# Altium PCB esc_backup.PcbDoc (part 1 of 2)
Units mil, origin at the board's own origin, x right, y up, seen from the top; angles counter-clockwise.
Board outline 1181.1 x 1181.1 mil, 2 copper layers (Top Layer, Bottom Layer); 362 components, 209 nets, 906 pads, 130 vias.
Unrouted connection lines stored in the file: 531.
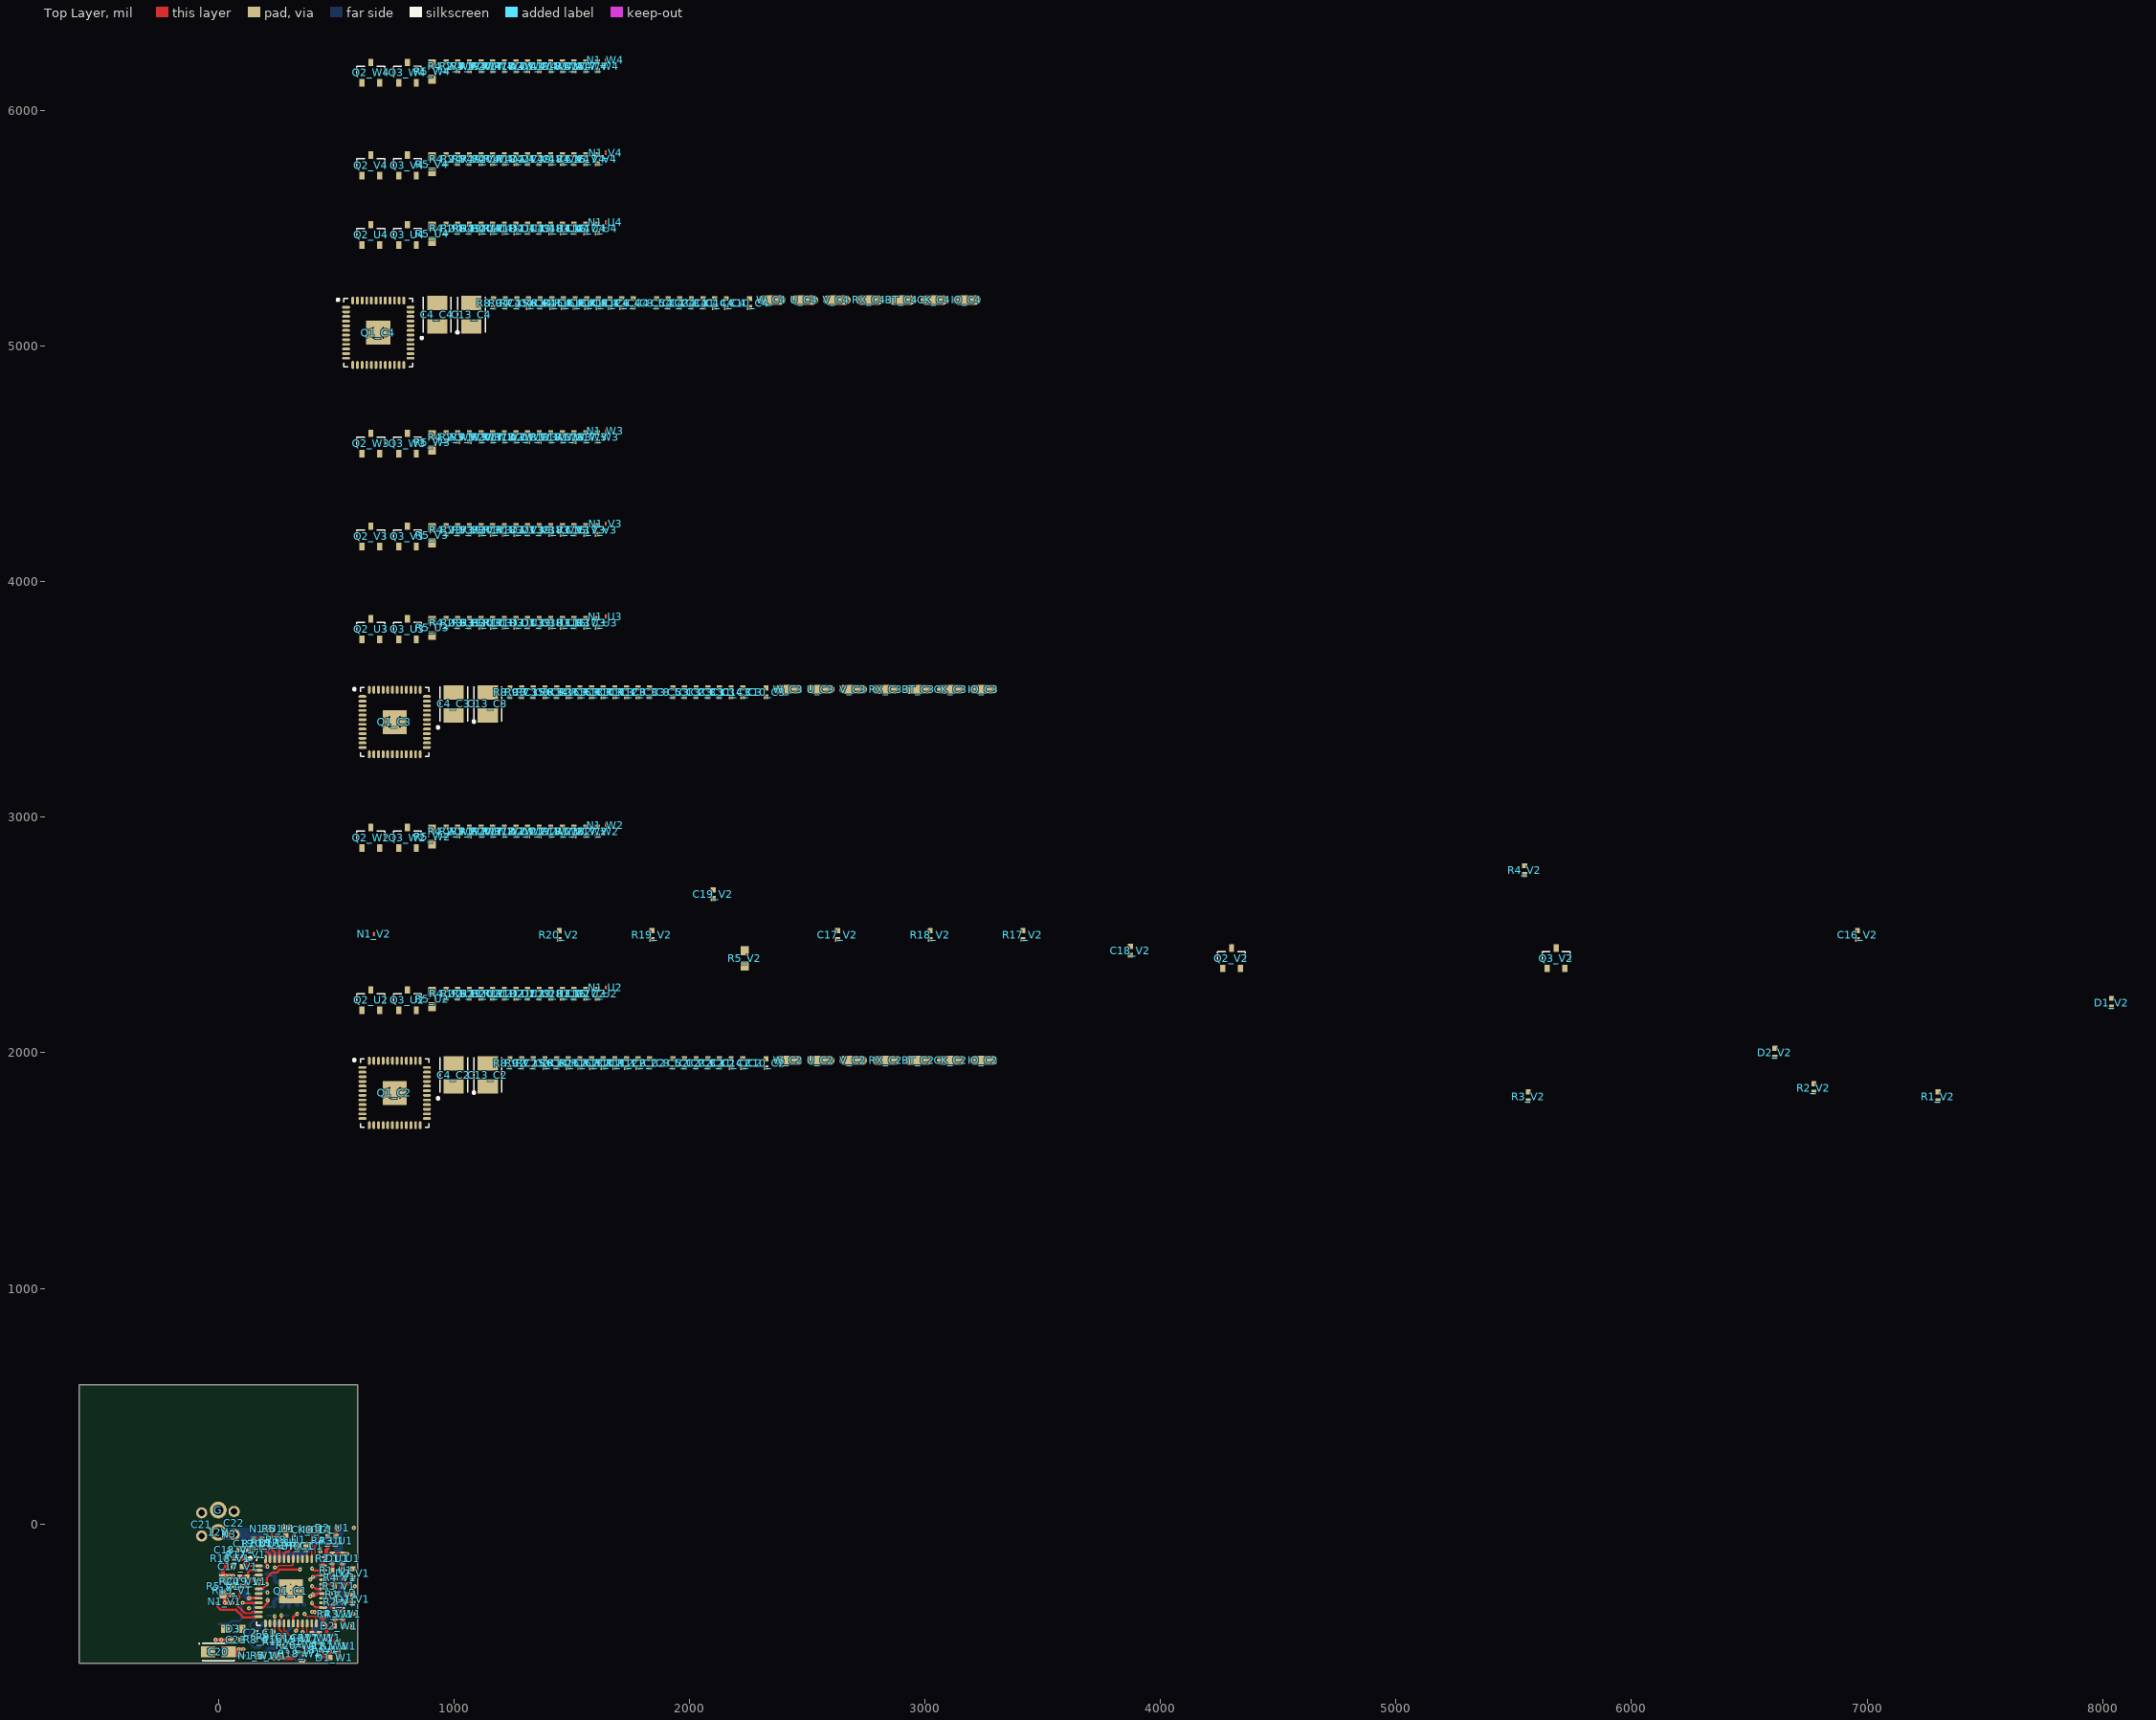
[diagram p0: Top Layer view]
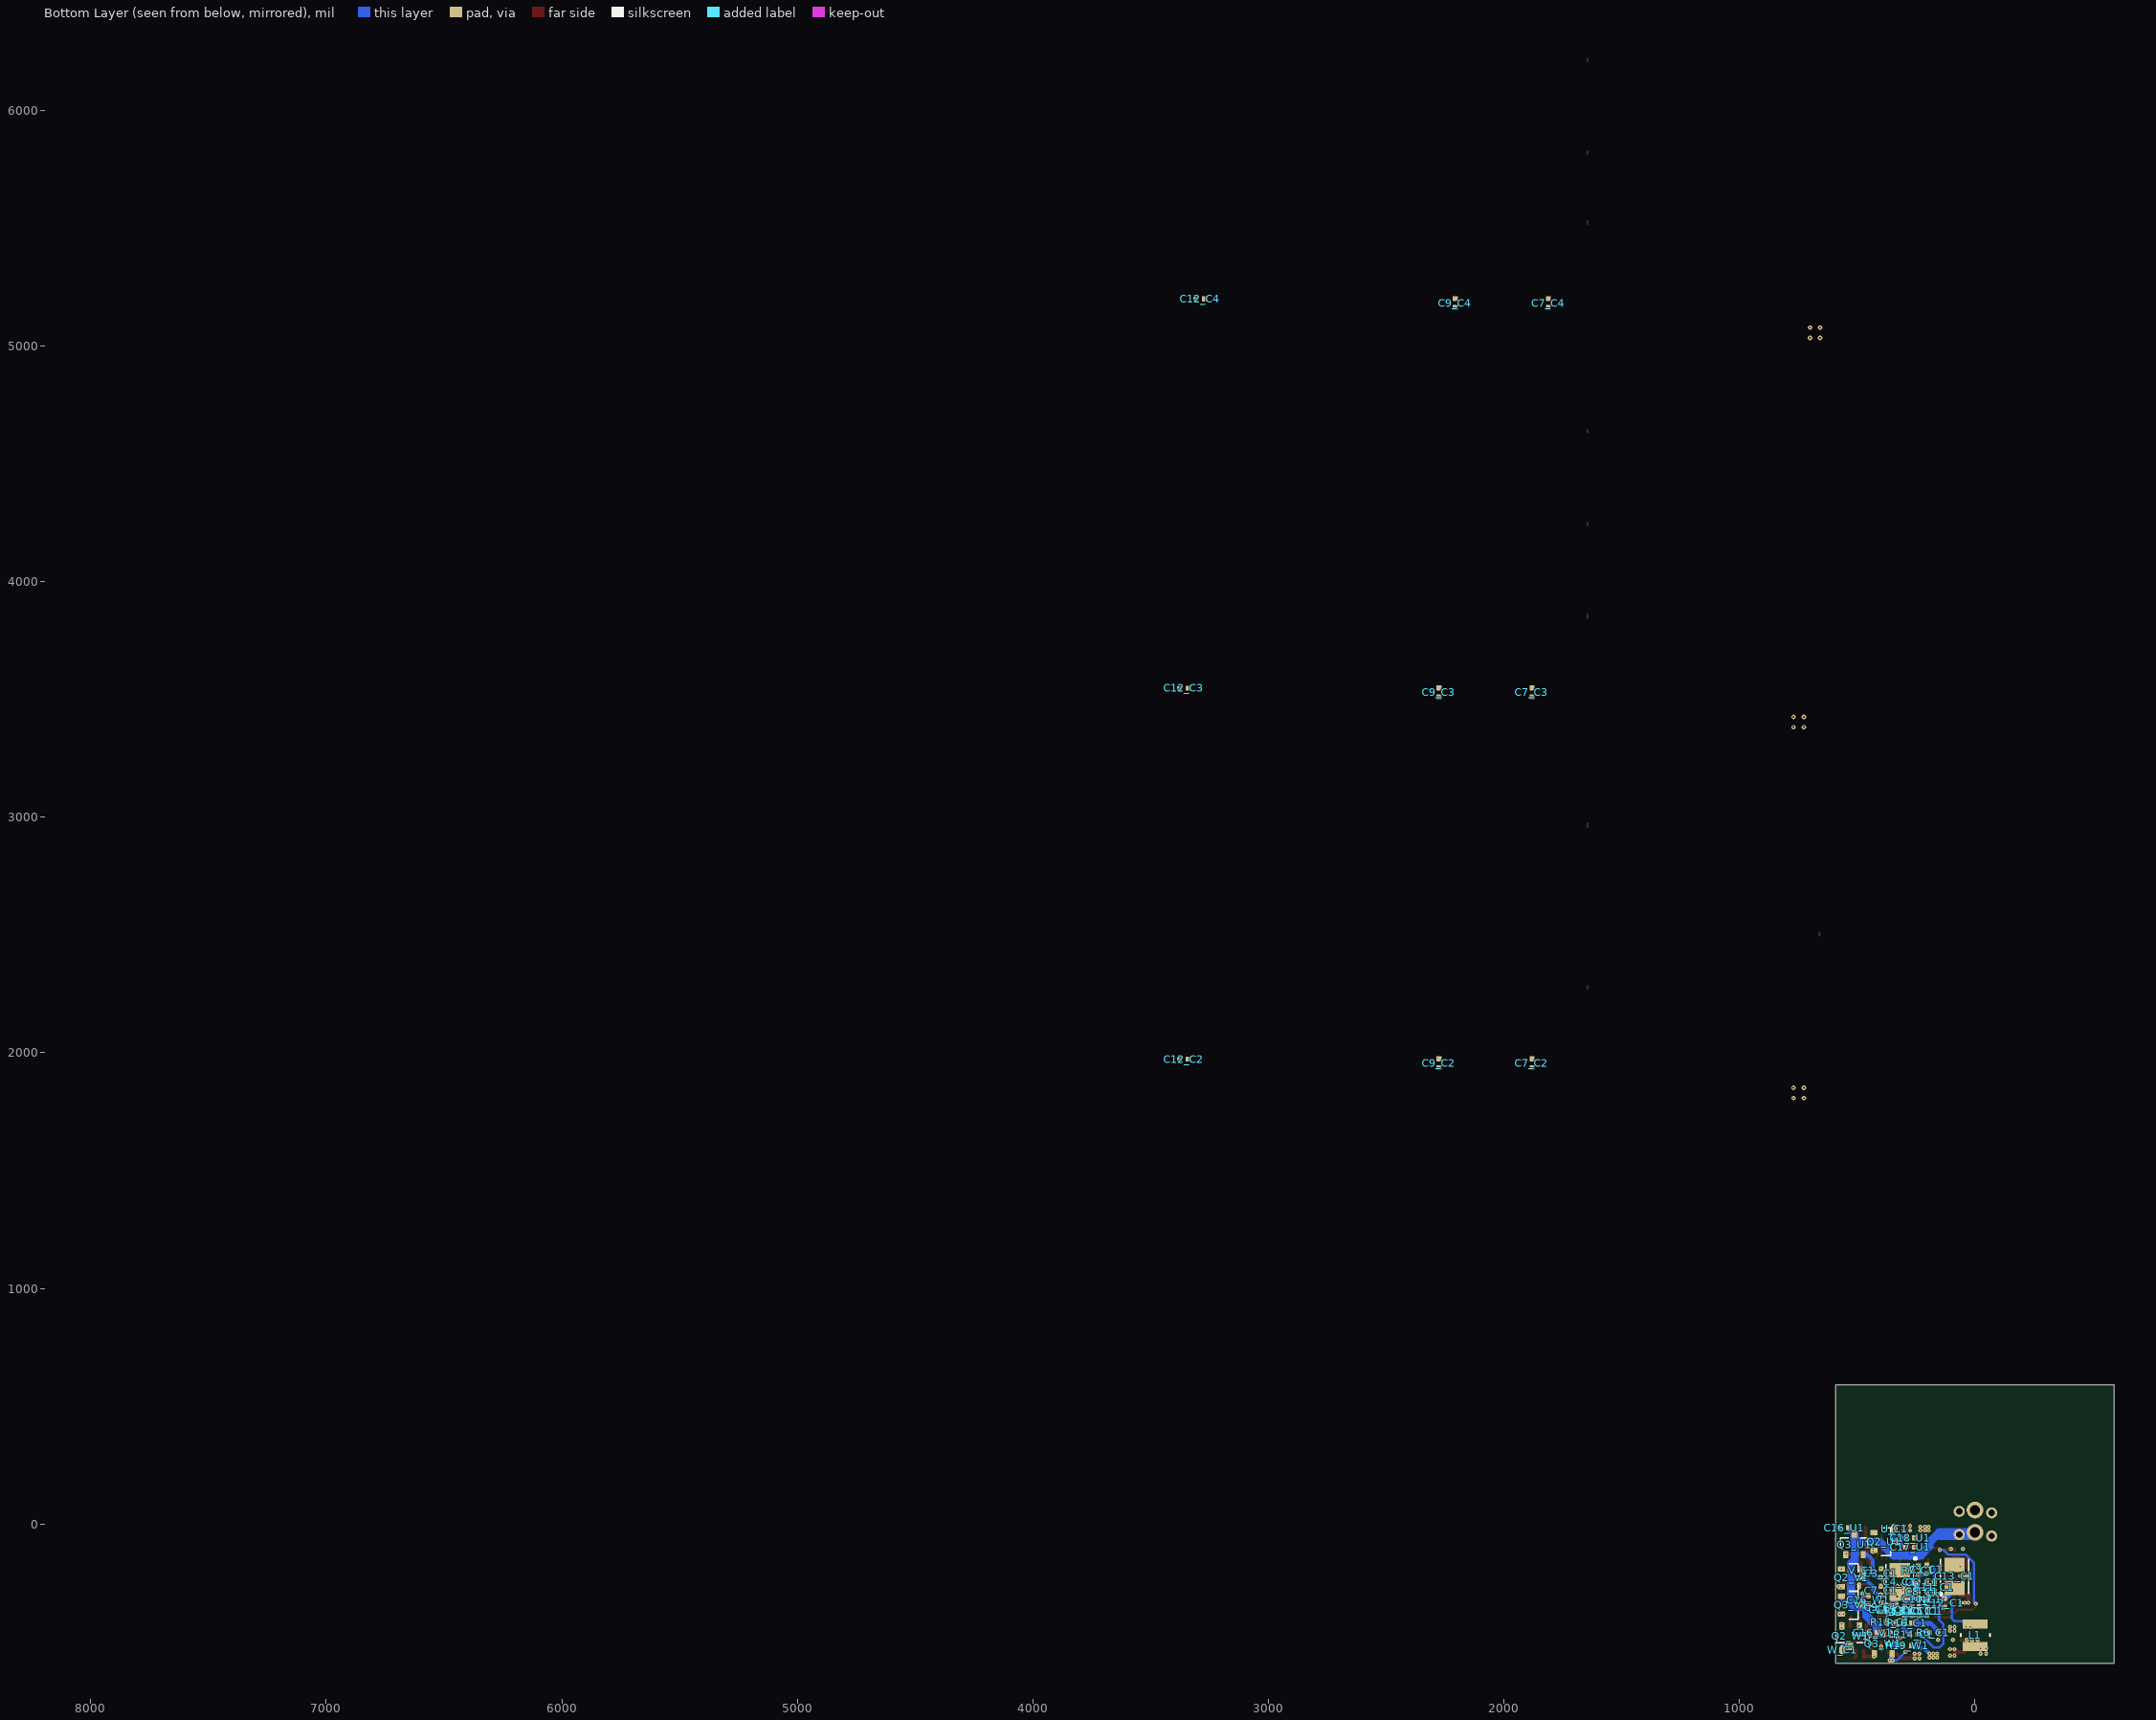
[diagram p1: Bottom Layer view, seen from below]

## Layer stack, top to bottom
Top Solder: solder mask 0.4, Solder Resist, Dk 3.5
Top Layer: signal copper 1.4
Dielectric 1: dielectric 12.6, FR-4, Dk 4.8
Bottom Layer: signal copper 1.4
Bottom Solder: solder mask 0.4, Solder Resist, Dk 3.5

## Board outline
-590.55,-590.55 -590.55,590.55 590.55,590.55 590.55,-590.55

## Design rules (kind name [scope] priority, off if disabled: settings)
Clearance [All] p1: gap=7 ignorepadtopadclearanceinfootprint=FALSE except(0: Arc-Hole Track-Hole SMDPad-Hole THPad-Hole Via-Hole Fill-Hole Poly-Hole Region-Hole Text-Hole; 10: THPad-THPad THPad-Via THPad-Fill THPad-Poly THPad-Region THPad-Text Via-Via Via-Fill Via-Poly Via-Region Via-Text Fill-Fill Fill-Poly Fill-Region Fill-Text Poly-Poly Poly-Region Poly-Text Region-Region Region-Text Text-Text)
ComponentClearance [All] p1: gap=6 collisioncheckmode=3 verticalgap=10 showdistances=FALSE
MinimumSolderMaskSliver [All] p1: minsoldermaskwidth=8
PolygonConnect [All] p1: connectstyle=Relief reliefconductorwidth=10 reliefentries=4 polygonreliefangle="90 Angle" airgapwidth=10
RoomDefinition W4 [InComponentClass('W4')] p1: confinementstyle=ConfineIn formatcopy=TRUE lockcomponents=FALSE outline 561.73,5846.42 7353.07,5846.42 7353.07,6240.12 561.73,6240.12
RoomDefinition W3 [InComponentClass('W3')] p2: confinementstyle=ConfineIn formatcopy=TRUE lockcomponents=FALSE outline 561.73,4271.61 7353.07,4271.61 7353.07,4665.32 561.73,4665.32
RoomDefinition W2 [InComponentClass('W2')] p3: confinementstyle=ConfineIn formatcopy=TRUE lockcomponents=FALSE outline 561.73,2696.81 7353.07,2696.81 7353.07,2992.09 561.73,2992.09
RoomDefinition V4 [InComponentClass('V4')] p4: confinementstyle=ConfineIn formatcopy=TRUE lockcomponents=FALSE outline 561.73,5452.72 7353.07,5452.72 7353.07,5846.42 561.73,5846.42
RoomDefinition V3 [InComponentClass('V3')] p5: confinementstyle=ConfineIn formatcopy=TRUE lockcomponents=FALSE outline 561.73,3877.91 7353.07,3877.91 7353.07,4271.61 561.73,4271.61
RoomDefinition V2 [InComponentClass('V2')] p6: confinementstyle=ConfineIn formatcopy=TRUE lockcomponents=FALSE outline 561.73,2303.11 7353.07,2303.11 7353.07,2696.81 561.73,2696.81
RoomDefinition U4 [InComponentClass('U4')] p7: confinementstyle=ConfineIn formatcopy=TRUE lockcomponents=FALSE outline 561.73,5157.44 7353.07,5157.44 7353.07,5551.14 561.73,5551.14
RoomDefinition U3 [InComponentClass('U3')] p8: confinementstyle=ConfineIn formatcopy=TRUE lockcomponents=FALSE outline 561.73,3582.64 7353.07,3582.64 7353.07,3877.91 561.73,3877.91
RoomDefinition U2 [InComponentClass('U2')] p9: confinementstyle=ConfineIn formatcopy=TRUE lockcomponents=FALSE outline 561.73,2007.83 7353.07,2007.83 7353.07,2303.11 561.73,2303.11
RoomDefinition C4 [InComponentClass('C4')] p10: confinementstyle=ConfineIn formatcopy=TRUE lockcomponents=FALSE outline 492.13,4644.69 12992.13,4644.69 12992.13,5235.24 492.13,5235.24
RoomDefinition C3 [InComponentClass('C3')] p11: confinementstyle=ConfineIn formatcopy=TRUE lockcomponents=FALSE outline 561.73,2992.09 13061.73,2992.09 13061.73,3582.64 561.73,3582.64
RoomDefinition C2 [InComponentClass('C2')] p12: confinementstyle=ConfineIn formatcopy=TRUE lockcomponents=FALSE outline 561.73,1417.28 13061.73,1417.28 13061.73,2007.83 561.73,2007.83
RoutingVias [All] p1: holewidth=5.91 width=17.72 viastyle="Through Hole" minholewidth=5.91 minwidth=17.72 maxholewidth=5.91 maxwidth=17.72
SilkToSolderMaskClearance [IsPad] p1: minsilkscreentomaskgap=5 clearancetoexposedcopper=TRUE
SolderMaskExpansion [All] p1: expansion=4
Width Width_hc [InNetClass('Undefined')] p1: maxlimit=100 minlimit=16 preferedwidth=16
Width [All] p2: maxlimit=50 minlimit=6 preferedwidth=6
27 further rules are at their usual default settings.

## Classes and differential pairs
net class hc: NetC3_C1_2 NetC3_C2_2 NetC3_C3_2 NetC3_C4_2 NetC7_C1_2 NetC7_C2_2 NetC7_C3_2 NetC7_C4_2 NetC9_C1_2 NetC9_C2_2 NetC9_C3_2 NetC9_C4_2 NetN1_U1_2 NetN1_U2_2 NetN1_U3_2 NetN1_U4_2 NetN1_V1_2 NetN1_V2_2 NetN1_V3_2 NetN1_V4_2 NetN1_W1_2 NetN1_W2_2 NetN1_W3_2 NetN1_W4_2 NetQ2_U1_S NetQ2_U2_S NetQ2_U3_S NetQ2_U4_S NetQ2_V1_S NetQ2_V2_S NetQ2_V3_S NetQ2_V4_S NetQ2_W1_S NetQ2_W2_S NetQ2_W3_S NetQ2_W4_S VBUS VM
component class C1: BT_C1 C1_C1 C2_C1 C3_C1 C4_C1 C5_C1 C6_C1 C7_C1 C8_C1 C9_C1 C10_C1 C11_C1 C12_C1 C13_C1 C14_C1 C15_C1 CK_C1 IO_C1 Q1_C1 R6_C1 R7_C1 R8_C1 R9_C1 R10_C1 R11_C1 R12_C1 R13_C1 R14_C1 R15_C1 R16_C1 RX_C1 U_C1 V_C1 W_C1
component class C2: BT_C2 C1_C2 C2_C2 C3_C2 C4_C2 C5_C2 C6_C2 C7_C2 C8_C2 C9_C2 C10_C2 C11_C2 C12_C2 C13_C2 C14_C2 C15_C2 CK_C2 IO_C2 Q1_C2 R6_C2 R7_C2 R8_C2 R9_C2 R10_C2 R11_C2 R12_C2 R13_C2 R14_C2 R15_C2 R16_C2 RX_C2 U_C2 V_C2 W_C2
component class C3: BT_C3 C1_C3 C2_C3 C3_C3 C4_C3 C5_C3 C6_C3 C7_C3 C8_C3 C9_C3 C10_C3 C11_C3 C12_C3 C13_C3 C14_C3 C15_C3 CK_C3 IO_C3 Q1_C3 R6_C3 R7_C3 R8_C3 R9_C3 R10_C3 R11_C3 R12_C3 R13_C3 R14_C3 R15_C3 R16_C3 RX_C3 U_C3 V_C3 W_C3
component class C4: BT_C4 C1_C4 C2_C4 C3_C4 C4_C4 C5_C4 C6_C4 C7_C4 C8_C4 C9_C4 C10_C4 C11_C4 C12_C4 C13_C4 C14_C4 C15_C4 CK_C4 IO_C4 Q1_C4 R6_C4 R7_C4 R8_C4 R9_C4 R10_C4 R11_C4 R12_C4 R13_C4 R14_C4 R15_C4 R16_C4 RX_C4 U_C4 V_C4 W_C4
component class esc: 12V C20 C21 C22 C23 D3 G L1 N2 N3
component class U1: C16_U1 C17_U1 C18_U1 C19_U1 D1_U1 D2_U1 N1_U1 Q2_U1 Q3_U1 R1_U1 R2_U1 R3_U1 R4_U1 R5_U1 R17_U1 R18_U1 R19_U1 R20_U1
component class U2: C16_U2 C17_U2 C18_U2 C19_U2 D1_U2 D2_U2 N1_U2 Q2_U2 Q3_U2 R1_U2 R2_U2 R3_U2 R4_U2 R5_U2 R17_U2 R18_U2 R19_U2 R20_U2
component class U3: C16_U3 C17_U3 C18_U3 C19_U3 D1_U3 D2_U3 N1_U3 Q2_U3 Q3_U3 R1_U3 R2_U3 R3_U3 R4_U3 R5_U3 R17_U3 R18_U3 R19_U3 R20_U3
component class U4: C16_U4 C17_U4 C18_U4 C19_U4 D1_U4 D2_U4 N1_U4 Q2_U4 Q3_U4 R1_U4 R2_U4 R3_U4 R4_U4 R5_U4 R17_U4 R18_U4 R19_U4 R20_U4
component class V1: C16_V1 C17_V1 C18_V1 C19_V1 D1_V1 D2_V1 N1_V1 Q2_V1 Q3_V1 R1_V1 R2_V1 R3_V1 R4_V1 R5_V1 R17_V1 R18_V1 R19_V1 R20_V1
component class V2: C16_V2 C17_V2 C18_V2 C19_V2 D1_V2 D2_V2 N1_V2 Q2_V2 Q3_V2 R1_V2 R2_V2 R3_V2 R4_V2 R5_V2 R17_V2 R18_V2 R19_V2 R20_V2
component class V3: C16_V3 C17_V3 C18_V3 C19_V3 D1_V3 D2_V3 N1_V3 Q2_V3 Q3_V3 R1_V3 R2_V3 R3_V3 R4_V3 R5_V3 R17_V3 R18_V3 R19_V3 R20_V3
component class V4: C16_V4 C17_V4 C18_V4 C19_V4 D1_V4 D2_V4 N1_V4 Q2_V4 Q3_V4 R1_V4 R2_V4 R3_V4 R4_V4 R5_V4 R17_V4 R18_V4 R19_V4 R20_V4
component class W1: C16_W1 C17_W1 C18_W1 C19_W1 D1_W1 D2_W1 N1_W1 Q2_W1 Q3_W1 R1_W1 R2_W1 R3_W1 R4_W1 R5_W1 R17_W1 R18_W1 R19_W1 R20_W1
component class W2: C16_W2 C17_W2 C18_W2 C19_W2 D1_W2 D2_W2 N1_W2 Q2_W2 Q3_W2 R1_W2 R2_W2 R3_W2 R4_W2 R5_W2 R17_W2 R18_W2 R19_W2 R20_W2
component class W3: C16_W3 C17_W3 C18_W3 C19_W3 D1_W3 D2_W3 N1_W3 Q2_W3 Q3_W3 R1_W3 R2_W3 R3_W3 R4_W3 R5_W3 R17_W3 R18_W3 R19_W3 R20_W3
component class W4: C16_W4 C17_W4 C18_W4 C19_W4 D1_W4 D2_W4 N1_W4 Q2_W4 Q3_W4 R1_W4 R2_W4 R3_W4 R4_W4 R5_W4 R17_W4 R18_W4 R19_W4 R20_W4
net class short: NetD1_U1_1 NetD1_U1_2 NetD1_U2_1 NetD1_U2_2 NetD1_U3_1 NetD1_U3_2 NetD1_U4_1 NetD1_U4_2 NetD1_V1_1 NetD1_V1_2 NetD1_V2_1 NetD1_V2_2 NetD1_V3_1 NetD1_V3_2 NetD1_V4_1 NetD1_V4_2 NetD1_W1_1 NetD1_W1_2 NetD1_W2_1 NetD1_W2_2 NetD1_W3_1 NetD1_W3_2 NetD1_W4_1 NetD1_W4_2 NetD2_U1_1 NetD2_U2_1 NetD2_U3_1 NetD2_U4_1 NetD2_V1_1 NetD2_V2_1 NetD2_V3_1 NetD2_V4_1 NetD2_W1_1 NetD2_W2_1 NetD2_W3_1 NetD2_W4_1 NetD3_2 NetN1_U1_2 NetN1_U2_2 NetN1_U3_2 NetN1_U4_2 NetN1_V1_2 NetN1_V2_2 NetN1_V3_2 NetN1_V4_2 NetN1_W1_2 NetN1_W2_2 NetN1_W3_2 NetN1_W4_2 NetQ1_C1_25 NetQ1_C1_28 NetQ1_C1_29 NetQ1_C1_32 NetQ1_C1_33 NetQ1_C1_36 NetQ1_C2_25 NetQ1_C2_28 NetQ1_C2_29 NetQ1_C2_32 NetQ1_C2_33 NetQ1_C2_36 NetQ1_C3_25 NetQ1_C3_28 NetQ1_C3_29 NetQ1_C3_32 NetQ1_C3_33 NetQ1_C3_36 NetQ1_C4_25 NetQ1_C4_28 NetQ1_C4_29 NetQ1_C4_32 NetQ1_C4_33 NetQ1_C4_36 NetQ2_U1_S NetQ2_U2_S NetQ2_U3_S NetQ2_U4_S NetQ2_V1_S NetQ2_V2_S NetQ2_V3_S NetQ2_V4_S NetQ2_W1_S NetQ2_W2_S NetQ2_W3_S NetQ2_W4_S SN1_C1 SN1_C2 SN1_C3 SN1_C4 SN2_C1 SN2_C2 SN2_C3 SN2_C4 SN3_C1 SN3_C2 SN3_C3 SN3_C4 SO1_C1 SO1_C2 SO1_C3 SO1_C4 SO2_C1 SO2_C2 SO2_C3 SO2_C4 SO3_C1 SO3_C2 SO3_C3 SO3_C4 SP1_C1 SP1_C2 SP1_C3 SP1_C4 SP2_C1 SP2_C2 SP2_C3 SP2_C4 SP3_C1 SP3_C2 SP3_C3 SP3_C4
channel class channel: C1 C2 C3 C4
channel class driver: U1 U2 U3 U4 V1 V2 V3 V4 W1 W2 W3 W4

## Components (designator, comment, footprint, x,y, rotation, side; value= is the part's Value field where it differs from the comment)
12V "12V" large_pin 0,-35.43 r0 top
BT_C1 "BT" solder_pin_small#1 -161.42,-94.49 r180 top (schematic designator BT)
BT_C2 "BT" solder_pin_small#2 2971.6,1968.15 r90 top (schematic designator BT)
BT_C3 "BT" solder_pin_small#2 2971.6,3542.95 r90 top (schematic designator BT)
BT_C4 "BT" solder_pin_small#2 2902,5195.55 r90 top (schematic designator BT)
C1_C1 "100nF" MY_0402 204.72,-192.91 r90 bottom (schematic designator C1)
C1_C2 "100nF" MY_0402 2029,1955.42 r90 top (schematic designator C1)
C1_C3 "100nF" MY_0402 2029,3530.22 r90 top (schematic designator C1)
C1_C4 "100nF" MY_0402 1959.39,5182.82 r90 top (schematic designator C1)
C2_C1 "100nF" MY_0402 177.17,-460.63 r180 top value=4.7nF (schematic designator C2)
C2_C2 "100nF" MY_0402 2078.4,1955.42 r90 top value=4.7nF (schematic designator C2)
C2_C3 "100nF" MY_0402 2078.4,3530.22 r90 top value=4.7nF (schematic designator C2)
C2_C4 "100nF" MY_0402 2008.79,5182.82 r90 top value=4.7nF (schematic designator C2)
C3_C1 "100nF/25V" MY_0402 397.64,-208.66 r270 bottom value=100nF (schematic designator C3)
C3_C2 "100nF/25V" MY_0402 2127.8,1955.42 r90 top value=100nF (schematic designator C3)
C3_C3 "100nF/25V" MY_0402 2127.8,3530.22 r90 top value=100nF (schematic designator C3)
C3_C4 "100nF/25V" MY_0402 2058.19,5182.82 r90 top value=100nF (schematic designator C3)
C4_C1 "TCJB226M025R0150" my_1210_pol 318.9,-246.06 r270 bottom value="22uF 25V" (schematic designator C4)
C4_C2 "TCJB226M025R0150" my_1210_pol 999.02,1906.2 r90 top value="22uF 25V" (schematic designator C4)
C4_C3 "TCJB226M025R0150" my_1210_pol 999.02,3481.01 r90 top value="22uF 25V" (schematic designator C4)
C4_C4 "TCJB226M025R0150" my_1210_pol 929.42,5133.61 r90 top value="22uF 25V" (schematic designator C4)
C5_C1 "100nF" MY_0402 204.72,-370.08 r270 bottom value=4.7nF (schematic designator C5)
C5_C2 "100nF" MY_0402 1979.6,1955.42 r90 top value=4.7nF (schematic designator C5)
C5_C3 "100nF" MY_0402 1979.6,3530.22 r90 top value=4.7nF (schematic designator C5)
C5_C4 "100nF" MY_0402 1909.99,5182.82 r90 top value=4.7nF (schematic designator C5)
C6_C1 "100nF" MY_0402 224.41,-248.03 r180 bottom (schematic designator C6)
C6_C2 "100nF" MY_0402 1831.39,1955.42 r90 top (schematic designator C6)
C6_C3 "100nF" MY_0402 1831.39,3530.22 r90 top (schematic designator C6)
C6_C4 "100nF" MY_0402 1761.79,5182.82 r90 top (schematic designator C6)
C7_C1 "100nF/25V" MY_0402 397.64,-283.46 r270 bottom value=100nF (schematic designator C7)
C7_C2 "100nF/25V" MY_0402 1880.79,1955.42 r270 bottom value=100nF (schematic designator C7)
C7_C3 "100nF/25V" MY_0402 1880.79,3530.22 r270 bottom value=100nF (schematic designator C7)
C7_C4 "100nF/25V" MY_0402 1811.19,5182.82 r270 bottom value=100nF (schematic designator C7)
C8_C1 "3.3nF" MY_0402 223.43,-287.4 r0 bottom value=100nF (schematic designator C8)
C8_C2 "3.3nF" MY_0402 1930.2,1955.42 r90 top value=100nF (schematic designator C8)
C8_C3 "3.3nF" MY_0402 1930.2,3530.22 r90 top value=100nF (schematic designator C8)
C8_C4 "3.3nF" MY_0402 1860.59,5182.82 r90 top value=100nF (schematic designator C8)
C9_C1 "100nF/25V" MY_0402 397.64,-354.33 r270 bottom value=100nF (schematic designator C9)
C9_C2 "100nF/25V" MY_0402 2276.01,1955.42 r90 bottom value=100nF (schematic designator C9)
C9_C3 "100nF/25V" MY_0402 2276.01,3530.22 r90 bottom value=100nF (schematic designator C9)
C9_C4 "100nF/25V" MY_0402 2206.4,5182.82 r90 bottom value=100nF (schematic designator C9)
C10_C1 "100nF" MY_0402 224.41,-318.9 r0 bottom (schematic designator C10)
C10_C2 "100nF" MY_0402 2325.41,1955.42 r90 top (schematic designator C10)
C10_C3 "100nF" MY_0402 2325.41,3530.22 r90 top (schematic designator C10)
C10_C4 "100nF" MY_0402 2255.8,5182.82 r90 top (schematic designator C10)
C11_C1 "100nF" MY_0402 267.72,-370.08 r270 bottom value=4.7nF (schematic designator C11)
C11_C2 "100nF" MY_0402 2177.2,1955.42 r90 top value=4.7nF (schematic designator C11)
C11_C3 "100nF" MY_0402 2177.2,3530.22 r90 top value=4.7nF (schematic designator C11)
C11_C4 "100nF" MY_0402 2107.6,5182.82 r90 top value=4.7nF (schematic designator C11)
C12_C1 "220nF/25V" MY_0402 129.92,-334.65 r270 bottom value=100nF (schematic designator C12)
C12_C2 "220nF/25V" MY_0402 3359.3,1973.13 r0 bottom value=100nF (schematic designator C12)
C12_C3 "220nF/25V" MY_0402 3359.3,3547.94 r0 bottom value=100nF (schematic designator C12)
C12_C4 "220nF/25V" MY_0402 3289.69,5200.54 r0 bottom value=100nF (schematic designator C12)
C13_C1 "TCJB226M025R0150" my_1210_pol 86.61,-222.44 r90 bottom value="22uF 25V" (schematic designator C13)
C13_C2 "TCJB226M025R0150" my_1210_pol 1143.9,1906.2 r90 top value="22uF 25V" (schematic designator C13)
C13_C3 "TCJB226M025R0150" my_1210_pol 1143.9,3481.01 r90 top value="22uF 25V" (schematic designator C13)
C13_C4 "TCJB226M025R0150" my_1210_pol 1074.29,5133.61 r90 top value="22uF 25V" (schematic designator C13)
C14_C1 "220pF" MY_0402 366.14,-363.19 r90 bottom value=4.7nF (schematic designator C14)
C14_C2 "220pF" MY_0402 2226.6,1955.42 r90 top value=4.7nF (schematic designator C14)
C14_C3 "220pF" MY_0402 2226.6,3530.22 r90 top value=4.7nF (schematic designator C14)
C14_C4 "220pF" MY_0402 2157,5182.82 r90 top value=4.7nF (schematic designator C14)
C15_C1 "4.7nF" MY_0402 334.65,-363.19 r90 bottom (schematic designator C15)
C15_C2 "4.7nF" MY_0402 1386.78,1955.42 r90 top (schematic designator C15)
C15_C3 "4.7nF" MY_0402 1386.78,3530.22 r90 top (schematic designator C15)
C15_C4 "4.7nF" MY_0402 1317.17,5182.82 r90 top (schematic designator C15)
C16_U1 "220nF/25V" MY_0402 555.12,-15.75 r180 bottom value=10nF (schematic designator C16)
C16_U2 "220nF/25V" MY_0402 1559.74,2250.69 r90 top value=10nF (schematic designator C16)
C16_U3 "220nF/25V" MY_0402 1559.74,3825.5 r90 top value=10nF (schematic designator C16)
C16_U4 "220nF/25V" MY_0402 1559.74,5498.72 r90 top value=10nF (schematic designator C16)
C16_V1 "220nF/25V" MY_0402 434.06,-460.63 r180 bottom value=10nF (schematic designator C16)
C16_V2 "220nF/25V" MY_0402 6959.37,2499.96 r90 top value=10nF (schematic designator C16)
C16_V3 "220nF/25V" MY_0402 1559.74,4219.2 r90 top value=10nF (schematic designator C16)
C16_V4 "220nF/25V" MY_0402 1559.74,5794 r90 top value=10nF (schematic designator C16)
C16_W1 "220nF/25V" MY_0402 452.76,-322.83 r270 bottom value=10nF (schematic designator C16)
C16_W2 "220nF/25V" MY_0402 1559.74,2939.67 r90 top value=10nF (schematic designator C16)
C16_W3 "220nF/25V" MY_0402 1559.74,4612.9 r90 top value=10nF (schematic designator C16)
C16_W4 "220nF/25V" MY_0402 1559.74,6187.7 r90 top value=10nF (schematic designator C16)
C17_U1 "680pF" MY_0402 275.59,-98.43 r0 bottom value=10nF (schematic designator C17)
C17_U2 "680pF" MY_0402 1609.14,2250.69 r90 top value=10nF (schematic designator C17)
C17_U3 "680pF" MY_0402 1609.14,3825.5 r90 top value=10nF (schematic designator C17)
C17_U4 "680pF" MY_0402 1609.14,5498.72 r90 top value=10nF (schematic designator C17)
C17_V1 "680pF" MY_0402 82.68,-181.1 r180 top value=10nF (schematic designator C17)
C17_V2 "680pF" MY_0402 2628.66,2499.96 r90 top value=10nF (schematic designator C17)
C17_V3 "680pF" MY_0402 1609.14,4219.2 r90 top value=10nF (schematic designator C17)
C17_V4 "680pF" MY_0402 1609.14,5794 r90 top value=10nF (schematic designator C17)
C17_W1 "680pF" MY_0402 397.64,-484.25 r270 top value=10nF (schematic designator C17)
C17_W2 "680pF" MY_0402 1609.14,2939.67 r90 top value=10nF (schematic designator C17)
C17_W3 "680pF" MY_0402 1609.14,4612.9 r90 top value=10nF (schematic designator C17)
C17_W4 "680pF" MY_0402 1609.14,6187.7 r90 top value=10nF (schematic designator C17)
C18_U1 "100nF" MY_0402 275.59,-59.06 r180 bottom value=10nF (schematic designator C18)
C18_U2 "100nF" MY_0402 1460.94,2250.69 r90 top value=10nF (schematic designator C18)
C18_U3 "100nF" MY_0402 1460.94,3825.5 r90 top value=10nF (schematic designator C18)
C18_U4 "100nF" MY_0402 1460.94,5498.72 r90 top value=10nF (schematic designator C18)
C18_V1 "100nF" MY_0402 67.91,-110.24 r0 top value=10nF (schematic designator C18)
C18_V2 "100nF" MY_0402 3872.76,2433.03 r90 top value=10nF (schematic designator C18)
C18_V3 "100nF" MY_0402 1460.94,4219.2 r90 top value=10nF (schematic designator C18)
C18_V4 "100nF" MY_0402 1460.94,5794 r90 top value=10nF (schematic designator C18)
C18_W1 "100nF" MY_0402 417.32,-535.43 r0 top value=10nF (schematic designator C18)
C18_W2 "100nF" MY_0402 1460.94,2939.67 r90 top value=10nF (schematic designator C18)
C18_W3 "100nF" MY_0402 1460.94,4612.9 r90 top value=10nF (schematic designator C18)
C18_W4 "100nF" MY_0402 1460.94,6187.7 r90 top value=10nF (schematic designator C18)
C19_U1 "100pf" MY_0402 149.61,-82.68 r270 top value=10nF (schematic designator C19)
C19_U2 "100pf" MY_0402 1411.53,2250.69 r90 top value=10nF (schematic designator C19)
C19_U3 "100pf" MY_0402 1411.53,3825.5 r90 top value=10nF (schematic designator C19)
C19_U4 "100pf" MY_0402 1411.53,5498.72 r90 top value=10nF (schematic designator C19)
C19_V1 "100pf" MY_0402 122.05,-244.09 r270 top value=10nF (schematic designator C19)
C19_V2 "100pf" MY_0402 2101.1,2673.19 r90 top value=10nF (schematic designator C19)
C19_V3 "100pf" MY_0402 1411.53,4219.2 r90 top value=10nF (schematic designator C19)
C19_V4 "100pf" MY_0402 1411.53,5794 r90 top value=10nF (schematic designator C19)
C19_W1 "100pf" MY_0402 334.65,-488.19 r180 top value=10nF (schematic designator C19)
C19_W2 "100pf" MY_0402 1411.53,2939.67 r90 top value=10nF (schematic designator C19)
C19_W3 "100pf" MY_0402 1411.53,4612.9 r90 top value=10nF (schematic designator C19)
C19_W4 "100pf" MY_0402 1411.53,6187.7 r90 top value=10nF (schematic designator C19)
C20 "TCJA476M006R0100" my_1206_pol 0,-543.31 r0 top value="47uF 6.3V"
C21 "25PX220MEFCTA6.3X11" rad_2.5mm_0.7mm -70.87,-1.97 r90 top value=10uF
C22 "25PX220MEFCTA6.3X11" rad_2.5mm_0.7mm 66.93,3.94 r90 top value=10uF
C23 "100nF" MY_0402 74.8,-492.13 r180 top
CK_C1 "CK" solder_pin_small#3 -118.11,-23.62 r0 top (schematic designator CK)
CK_C2 "CK" solder_pin_small#2 3109.71,1968.15 r90 top (schematic designator CK)
CK_C3 "CK" solder_pin_small#2 3109.71,3542.95 r90 top (schematic designator CK)
CK_C4 "CK" solder_pin_small#2 3040.11,5195.55 r90 top (schematic designator CK)
D1_U1 "NSR05F40NXT5G" MY_0402 527.56,-145.67 r270 top (schematic designator D1)
D1_U2 "NSR05F40NXT5G" MY_0402 1362.13,2250.69 r90 top (schematic designator D1)
D1_U3 "NSR05F40NXT5G" MY_0402 1362.13,3825.5 r90 top (schematic designator D1)
D1_U4 "NSR05F40NXT5G" MY_0402 1362.13,5498.72 r90 top (schematic designator D1)
D1_V1 "NSR05F40NXT5G" MY_0402 570.87,-318.9 r90 top (schematic designator D1)
D1_V2 "NSR05F40NXT5G" MY_0402 8038.11,2212.56 r90 top (schematic designator D1)
D1_V3 "NSR05F40NXT5G" MY_0402 1362.13,4219.2 r90 top (schematic designator D1)
D1_V4 "NSR05F40NXT5G" MY_0402 1362.13,5794 r90 top (schematic designator D1)
D1_W1 "NSR05F40NXT5G" MY_0402 492.13,-566.93 r0 top (schematic designator D1)
D1_W2 "NSR05F40NXT5G" MY_0402 1362.13,2939.67 r90 top (schematic designator D1)
D1_W3 "NSR05F40NXT5G" MY_0402 1362.13,4612.9 r90 top (schematic designator D1)
D1_W4 "NSR05F40NXT5G" MY_0402 1362.13,6187.7 r90 top (schematic designator D1)
D2_U1 "NSR05F40NXT5G" MY_0402 484.25,-15.75 r0 top (schematic designator D2)
D2_U2 "NSR05F40NXT5G" MY_0402 1312.73,2250.69 r90 top (schematic designator D2)
D2_U3 "NSR05F40NXT5G" MY_0402 1312.73,3825.5 r90 top (schematic designator D2)
D2_U4 "NSR05F40NXT5G" MY_0402 1312.73,5498.72 r90 top (schematic designator D2)
D2_V1 "NSR05F40NXT5G" MY_0402 570.87,-208.66 r270 top (schematic designator D2)
D2_V2 "NSR05F40NXT5G" MY_0402 6608.98,1999.96 r90 top (schematic designator D2)
D2_V3 "NSR05F40NXT5G" MY_0402 1312.73,4219.2 r90 top (schematic designator D2)
D2_V4 "NSR05F40NXT5G" MY_0402 1312.73,5794 r90 top (schematic designator D2)
D2_W1 "NSR05F40NXT5G" MY_0402 511.81,-433.07 r0 top (schematic designator D2)
D2_W2 "NSR05F40NXT5G" MY_0402 1312.73,2939.67 r90 top (schematic designator D2)
D2_W3 "NSR05F40NXT5G" MY_0402 1312.73,4612.9 r90 top (schematic designator D2)
D2_W4 "NSR05F40NXT5G" MY_0402 1312.73,6187.7 r90 top (schematic designator D2)
D3 "CD0603-B0340R" my_0603 62.99,-444.88 r180 top
G "G" large_pin 0,59.06 r90 top
IO_C1 "IO" solder_pin_small#1 -74.8,-23.62 r180 top (schematic designator IO)
IO_C2 "IO" solder_pin_small#2 3247.82,1968.15 r90 top (schematic designator IO)
IO_C3 "IO" solder_pin_small#2 3247.82,3542.95 r90 top (schematic designator IO)
IO_C4 "IO" solder_pin_small#2 3178.22,5195.55 r90 top (schematic designator IO)
L1 "74404032220" IND_3_3 0,-472.44 r90 bottom value="22uH 0.6A"
N1_U1 "fake_net" fake_net 200.79,-19.68 r0 top net-tie (schematic designator N1)
N1_U2 "fake_net" fake_net 1644.84,2272.27 r90 top net-tie (schematic designator N1)
N1_U3 "fake_net" fake_net 1644.84,3847.07 r90 top net-tie (schematic designator N1)
N1_U4 "fake_net" fake_net 1644.84,5520.3 r90 top net-tie (schematic designator N1)
N1_V1 "fake_net" fake_net 27.56,-334.65 r90 top net-tie (schematic designator N1)
N1_V2 "fake_net" fake_net 660.16,2499.96 r90 top net-tie (schematic designator N1)
N1_V3 "fake_net" fake_net 1644.84,4240.77 r90 top net-tie (schematic designator N1)
N1_V4 "fake_net" fake_net 1644.84,5815.58 r90 top net-tie (schematic designator N1)
N1_W1 "fake_net" fake_net 157.48,-559.06 r0 top net-tie (schematic designator N1)
N1_W2 "fake_net" fake_net 1644.84,2961.24 r90 top net-tie (schematic designator N1)
N1_W3 "fake_net" fake_net 1644.84,4634.47 r90 top net-tie (schematic designator N1)
N1_W4 "fake_net" fake_net 1644.84,6209.28 r90 top net-tie (schematic designator N1)
N2 "fake_net" fake_net 209,-313.34 r270 bottom net-tie
N3 "fake_net" fake_net 39.37,-43.31 r0 top net-tie
Q1_C1 "STSPIN32F0A" VFQFPN48 308.07,-285.43 r0 top (schematic designator Q1)
Q1_C2 "STSPIN32F0A" VFQFPN48 748.83,1829.43 r0 top (schematic designator Q1)
Q1_C3 "STSPIN32F0A" VFQFPN48 748.83,3404.24 r0 top (schematic designator Q1)
Q1_C4 "STSPIN32F0A" VFQFPN48 679.23,5056.83 r0 top (schematic designator Q1)
Q2_U1 "IRLML0030TRPBF" Micro3 385.83,-74.8 r180 bottom (schematic designator Q2)
Q2_U2 "IRLML0030TRPBF" Micro3 647.46,2224.06 r90 top (schematic designator Q2)
Q2_U3 "IRLML0030TRPBF" Micro3 647.46,3798.86 r90 top (schematic designator Q2)
Q2_U4 "IRLML0030TRPBF" Micro3 647.46,5472.09 r90 top (schematic designator Q2)
Q2_V1 "IRLML0030TRPBF" Micro3 523.62,-228.35 r180 bottom (schematic designator Q2)
Q2_V2 "IRLML0030TRPBF" Micro3 4301.89,2401.54 r90 top (schematic designator Q2)
Q2_V3 "IRLML0030TRPBF" Micro3 647.46,4192.56 r90 top (schematic designator Q2)
Q2_V4 "IRLML0030TRPBF" Micro3 647.46,5767.36 r90 top (schematic designator Q2)
Q2_W1 "IRLML0030TRPBF" Micro3 527.56,-476.38 r270 bottom (schematic designator Q2)
Q2_W2 "IRLML0030TRPBF" Micro3 647.46,2913.03 r90 top (schematic designator Q2)
Q2_W3 "IRLML0030TRPBF" Micro3 647.46,4586.26 r90 top (schematic designator Q2)
Q2_W4 "IRLML0030TRPBF" Micro3 647.46,6161.06 r90 top (schematic designator Q2)
Q3_U1 "IRLML0030TRPBF" Micro3 511.81,-86.61 r90 bottom (schematic designator Q3)
Q3_U2 "IRLML0030TRPBF" Micro3 803.16,2224.06 r90 top (schematic designator Q3)
Q3_U3 "IRLML0030TRPBF" Micro3 803.16,3798.86 r90 top (schematic designator Q3)
Q3_U4 "IRLML0030TRPBF" Micro3 803.16,5472.09 r90 top (schematic designator Q3)
Q3_V1 "IRLML0030TRPBF" Micro3 523.62,-344.49 r180 bottom (schematic designator Q3)
Q3_V2 "IRLML0030TRPBF" Micro3 5679.84,2401.54 r90 top (schematic designator Q3)
Q3_V3 "IRLML0030TRPBF" Micro3 803.16,4192.56 r90 top (schematic designator Q3)
Q3_V4 "IRLML0030TRPBF" Micro3 803.16,5767.36 r90 top (schematic designator Q3)
Q3_W1 "IRLML0030TRPBF" Micro3 389.76,-507.87 r90 bottom (schematic designator Q3)
Q3_W2 "IRLML0030TRPBF" Micro3 803.16,2913.03 r90 top (schematic designator Q3)
Q3_W3 "IRLML0030TRPBF" Micro3 803.16,4586.26 r90 top (schematic designator Q3)
Q3_W4 "IRLML0030TRPBF" Micro3 803.16,6161.06 r90 top (schematic designator Q3)
R1_U1 "10" MY_0402 500,-196.85 r0 top (schematic designator R1)
R1_U2 "10" MY_0402 1510.34,2250.69 r90 top (schematic designator R1)
R1_U3 "10" MY_0402 1510.34,3825.5 r90 top (schematic designator R1)
R1_U4 "10" MY_0402 1510.34,5498.72 r90 top (schematic designator R1)
R1_V1 "10" MY_0402 523.62,-299.21 r0 top (schematic designator R1)
R1_V2 "10" MY_0402 7301.89,1814.92 r90 top (schematic designator R1)
R1_V3 "10" MY_0402 1510.34,4219.2 r90 top (schematic designator R1)
R1_V4 "10" MY_0402 1510.34,5794 r90 top (schematic designator R1)
R1_W1 "10" MY_0402 507.87,-518.7 r270 top (schematic designator R1)
R1_W2 "10" MY_0402 1510.34,2939.67 r90 top (schematic designator R1)
R1_W3 "10" MY_0402 1510.34,4612.9 r90 top (schematic designator R1)
R1_W4 "10" MY_0402 1510.34,6187.7 r90 top (schematic designator R1)
R2_U1 "50" MY_0402 484.25,-145.67 r90 top (schematic designator R2)
R2_U2 "50" MY_0402 1016.32,2250.69 r90 top (schematic designator R2)
R2_U3 "50" MY_0402 1016.32,3825.5 r90 top (schematic designator R2)
R2_U4 "50" MY_0402 1016.32,5498.72 r90 top (schematic designator R2)
R2_V1 "50" MY_0402 515.75,-330.71 r0 top (schematic designator R2)
R2_V2 "50" MY_0402 6774.33,1850.35 r90 top (schematic designator R2)
R2_V3 "50" MY_0402 1016.32,4219.2 r90 top (schematic designator R2)
R2_V4 "50" MY_0402 1016.32,5794 r90 top (schematic designator R2)
R2_W1 "50" MY_0402 472.44,-518.7 r270 top (schematic designator R2)
R2_W2 "50" MY_0402 1016.32,2939.67 r90 top (schematic designator R2)
R2_W3 "50" MY_0402 1016.32,4612.9 r90 top (schematic designator R2)
R2_W4 "50" MY_0402 1016.32,6187.7 r90 top (schematic designator R2)
R3_U1 "10" MY_0402 500,-70.87 r90 top (schematic designator R3)
R3_U2 "10" MY_0402 1065.72,2250.69 r90 top (schematic designator R3)
R3_U3 "10" MY_0402 1065.72,3825.5 r90 top (schematic designator R3)
R3_U4 "10" MY_0402 1065.72,5498.72 r90 top (schematic designator R3)
R3_V1 "10" MY_0402 511.81,-263.78 r0 top (schematic designator R3)
R3_V2 "10" MY_0402 5561.73,1814.92 r90 top (schematic designator R3)
R3_V3 "10" MY_0402 1065.72,4219.2 r90 top (schematic designator R3)
R3_V4 "10" MY_0402 1065.72,5794 r90 top (schematic designator R3)
R3_W1 "10" MY_0402 527.56,-381.89 r270 top (schematic designator R3)
R3_W2 "10" MY_0402 1065.72,2939.67 r90 top (schematic designator R3)
R3_W3 "10" MY_0402 1065.72,4612.9 r90 top (schematic designator R3)
R3_W4 "10" MY_0402 1065.72,6187.7 r90 top (schematic designator R3)
R4_U1 "50" MY_0402 464.57,-70.87 r90 top (schematic designator R4)
R4_U2 "50" MY_0402 966.92,2250.69 r90 top (schematic designator R4)
R4_U3 "50" MY_0402 966.92,3825.5 r90 top (schematic designator R4)
R4_U4 "50" MY_0402 966.92,5498.72 r90 top (schematic designator R4)
R4_V1 "50" MY_0402 515.75,-228.35 r0 top (schematic designator R4)
R4_V2 "50" MY_0402 5545.98,2775.55 r90 top (schematic designator R4)
R4_V3 "50" MY_0402 966.92,4219.2 r90 top (schematic designator R4)
R4_V4 "50" MY_0402 966.92,5794 r90 top (schematic designator R4)
R4_W1 "50" MY_0402 496.06,-381.89 r270 top (schematic designator R4)
R4_W2 "50" MY_0402 966.92,2939.67 r90 top (schematic designator R4)
R4_W3 "50" MY_0402 966.92,4612.9 r90 top (schematic designator R4)
R4_W4 "50" MY_0402 966.92,6187.7 r90 top (schematic designator R4)
R5_U1 "0.01" MY_0603 255.91,-19.68 r0 top value=1K (schematic designator R5)
R5_U2 "0.01" MY_0603 907.68,2229.04 r90 top value=1K (schematic designator R5)
R5_U3 "0.01" MY_0603 907.68,3803.84 r90 top value=1K (schematic designator R5)
R5_U4 "0.01" MY_0603 907.68,5477.07 r90 top value=1K (schematic designator R5)
R5_V1 "0.01" MY_0603 19.68,-263.78 r90 top value=1K (schematic designator R5)
R5_V2 "0.01" MY_0603 2234.96,2401.54 r90 top value=1K (schematic designator R5)
R5_V3 "0.01" MY_0603 907.68,4197.54 r90 top value=1K (schematic designator R5)
R5_V4 "0.01" MY_0603 907.68,5772.35 r90 top value=1K (schematic designator R5)
R5_W1 "0.01" MY_0603 214.57,-559.06 r0 top value=1K (schematic designator R5)
R5_W2 "0.01" MY_0603 907.68,2918.02 r90 top value=1K (schematic designator R5)
R5_W3 "0.01" MY_0603 907.68,4591.24 r90 top value=1K (schematic designator R5)
R5_W4 "0.01" MY_0603 907.68,6166.05 r90 top value=1K (schematic designator R5)
R6_C1 "4.02k" MY_0402 177.17,-460.63 r0 bottom value=10K (schematic designator R6)
R6_C2 "4.02k" MY_0402 1436.18,1955.42 r90 top value=10K (schematic designator R6)
R6_C3 "4.02k" MY_0402 1436.18,3530.22 r90 top value=10K (schematic designator R6)
R6_C4 "4.02k" MY_0402 1366.57,5182.82 r90 top value=10K (schematic designator R6)
R7_C1 "10k" MY_0402 240.16,-196.85 r90 bottom value=10K (schematic designator R7)
R7_C2 "10k" MY_0402 1337.38,1955.42 r90 top value=10K (schematic designator R7)
R7_C3 "10k" MY_0402 1337.38,3530.22 r90 top value=10K (schematic designator R7)
R7_C4 "10k" MY_0402 1267.77,5182.82 r90 top value=10K (schematic designator R7)
R8_C1 "33k" MY_0402 176.18,-492.13 r0 top value=10K (schematic designator R8)
R8_C2 "33k" MY_0402 1238.57,1955.42 r90 top value=10K (schematic designator R8)
R8_C3 "33k" MY_0402 1238.57,3530.22 r90 top value=10K (schematic designator R8)
R8_C4 "33k" MY_0402 1168.97,5182.82 r90 top value=10K (schematic designator R8)
R9_C1 "33k" MY_0402 232.28,-480.32 r270 top value=10K (schematic designator R9)
R9_C2 "33k" MY_0402 1287.98,1955.42 r90 top value=10K (schematic designator R9)
R9_C3 "33k" MY_0402 1287.98,3530.22 r90 top value=10K (schematic designator R9)
R9_C4 "33k" MY_0402 1218.37,5182.82 r90 top value=10K (schematic designator R9)
R10_C1 "4.02k" MY_0402 236.22,-370.08 r90 bottom value=10K (schematic designator R10)
R10_C2 "4.02k" MY_0402 1683.19,1955.42 r90 top value=10K (schematic designator R10)
R10_C3 "4.02k" MY_0402 1683.19,3530.22 r90 top value=10K (schematic designator R10)
R10_C4 "4.02k" MY_0402 1613.58,5182.82 r90 top value=10K (schematic designator R10)
R11_C1 "39k" MY_0402 173.23,-267.72 r270 bottom value=10K (schematic designator R11)
R11_C2 "39k" MY_0402 1732.59,1955.42 r90 top value=10K (schematic designator R11)
R11_C3 "39k" MY_0402 1732.59,3530.22 r90 top value=10K (schematic designator R11)
R11_C4 "39k" MY_0402 1662.98,5182.82 r90 top value=10K (schematic designator R11)
R12_C1 "33k" MY_0402 271.65,-500 r270 top value=10K (schematic designator R12)
R12_C2 "33k" MY_0402 1781.99,1955.42 r90 top value=10K (schematic designator R12)
R12_C3 "33k" MY_0402 1781.99,3530.22 r90 top value=10K (schematic designator R12)
R12_C4 "33k" MY_0402 1712.38,5182.82 r90 top value=10K (schematic designator R12)
R13_C1 "4.02k" MY_0402 299.21,-370.08 r90 bottom value=10K (schematic designator R13)
R13_C2 "4.02k" MY_0402 1633.79,1955.42 r90 top value=10K (schematic designator R13)
R13_C3 "4.02k" MY_0402 1633.79,3530.22 r90 top value=10K (schematic designator R13)
R13_C4 "4.02k" MY_0402 1564.18,5182.82 r90 top value=10K (schematic designator R13)
R14_C1 "169K" MY_0402 260.83,-468.5 r180 bottom value=10K (schematic designator R14)
R14_C2 "169K" MY_0402 1485.58,1955.42 r90 top value=10K (schematic designator R14)
R14_C3 "169K" MY_0402 1485.58,3530.22 r90 top value=10K (schematic designator R14)
R14_C4 "169K" MY_0402 1415.98,5182.82 r90 top value=10K (schematic designator R14)
R15_C1 "4.7k" MY_0402 358.27,-417.32 r0 bottom value=10K (schematic designator R15)
R15_C2 "4.7k" MY_0402 1534.98,1955.42 r90 top value=10K (schematic designator R15)
R15_C3 "4.7k" MY_0402 1534.98,3530.22 r90 top value=10K (schematic designator R15)
R15_C4 "4.7k" MY_0402 1465.38,5182.82 r90 top value=10K (schematic designator R15)
R16_C1 "9.31K" MY_0402 287.4,-421.26 r0 bottom value=10K (schematic designator R16)
R16_C2 "9.31K" MY_0402 1584.39,1955.42 r90 top value=10K (schematic designator R16)
R16_C3 "9.31K" MY_0402 1584.39,3530.22 r90 top value=10K (schematic designator R16)
R16_C4 "9.31K" MY_0402 1514.78,5182.82 r90 top value=10K (schematic designator R16)
R17_U1 "8.2k" MY_0402 255.91,-78.74 r90 top value=1K (schematic designator R17)
R17_U2 "8.2k" MY_0402 1213.93,2250.69 r90 top value=1K (schematic designator R17)
R17_U3 "8.2k" MY_0402 1213.93,3825.5 r90 top value=1K (schematic designator R17)
R17_U4 "8.2k" MY_0402 1213.93,5498.72 r90 top value=1K (schematic designator R17)
R17_V1 "8.2k" MY_0402 118.11,-129.92 r90 top value=1K (schematic designator R17)
R17_V2 "8.2k" MY_0402 3416.06,2499.96 r90 top value=1K (schematic designator R17)
R17_V3 "8.2k" MY_0402 1213.93,4219.2 r90 top value=1K (schematic designator R17)
R17_V4 "8.2k" MY_0402 1213.93,5794 r90 top value=1K (schematic designator R17)
R17_W1 "8.2k" MY_0402 429.13,-484.25 r270 top value=1K (schematic designator R17)
R17_W2 "8.2k" MY_0402 1213.93,2939.67 r90 top value=1K (schematic designator R17)
R17_W3 "8.2k" MY_0402 1213.93,4612.9 r90 top value=1K (schematic designator R17)
R17_W4 "8.2k" MY_0402 1213.93,6187.7 r90 top value=1K (schematic designator R17)
R18_U1 "560" MY_0402 287.4,-67.91 r270 top value=1K (schematic designator R18)
R18_U2 "560" MY_0402 1263.33,2250.69 r90 top value=1K (schematic designator R18)
R18_U3 "560" MY_0402 1263.33,3825.5 r90 top value=1K (schematic designator R18)
R18_U4 "560" MY_0402 1263.33,5498.72 r90 top value=1K (schematic designator R18)
R18_V1 "560" MY_0402 51.18,-145.67 r0 top value=1K (schematic designator R18)
R18_V2 "560" MY_0402 3022.36,2499.96 r90 top value=1K (schematic designator R18)
R18_V3 "560" MY_0402 1263.33,4219.2 r90 top value=1K (schematic designator R18)
R18_V4 "560" MY_0402 1263.33,5794 r90 top value=1K (schematic designator R18)
R18_W1 "560" MY_0402 346.46,-551.18 r0 top value=1K (schematic designator R18)
R18_W2 "560" MY_0402 1263.33,2939.67 r90 top value=1K (schematic designator R18)
R18_W3 "560" MY_0402 1263.33,4612.9 r90 top value=1K (schematic designator R18)
R18_W4 "560" MY_0402 1263.33,6187.7 r90 top value=1K (schematic designator R18)
R19_U1 "1k" MY_0402 224.41,-78.74 r270 top value=1K (schematic designator R19)
R19_U2 "1k" MY_0402 1115.13,2250.69 r90 top value=1K (schematic designator R19)
R19_U3 "1k" MY_0402 1115.13,3825.5 r90 top value=1K (schematic designator R19)
R19_U4 "1k" MY_0402 1115.13,5498.72 r90 top value=1K (schematic designator R19)
R19_V1 "1k" MY_0402 59.06,-283.46 r90 top value=1K (schematic designator R19)
R19_V2 "1k" MY_0402 1841.26,2499.96 r90 top value=1K (schematic designator R19)
R19_V3 "1k" MY_0402 1115.13,4219.2 r90 top value=1K (schematic designator R19)
R19_V4 "1k" MY_0402 1115.13,5794 r90 top value=1K (schematic designator R19)
R19_W1 "1k" MY_0402 287.4,-515.75 r0 bottom value=1K (schematic designator R19)
R19_W2 "1k" MY_0402 1115.13,2939.67 r90 top value=1K (schematic designator R19)
R19_W3 "1k" MY_0402 1115.13,4612.9 r90 top value=1K (schematic designator R19)
R19_W4 "1k" MY_0402 1115.13,6187.7 r90 top value=1K (schematic designator R19)
R20_U1 "6.8k" MY_0402 185.04,-82.68 r90 top value=1K (schematic designator R20)
R20_U2 "6.8k" MY_0402 1164.53,2250.69 r90 top value=1K (schematic designator R20)
R20_U3 "6.8k" MY_0402 1164.53,3825.5 r90 top value=1K (schematic designator R20)
R20_U4 "6.8k" MY_0402 1164.53,5498.72 r90 top value=1K (schematic designator R20)
R20_V1 "6.8k" MY_0402 90.55,-244.09 r90 top value=1K (schematic designator R20)
R20_V2 "6.8k" MY_0402 1447.56,2499.96 r90 top value=1K (schematic designator R20)
R20_V3 "6.8k" MY_0402 1164.53,4219.2 r90 top value=1K (schematic designator R20)
R20_V4 "6.8k" MY_0402 1164.53,5794 r90 top value=1K (schematic designator R20)
R20_W1 "6.8k" MY_0402 334.65,-515.75 r0 top value=1K (schematic designator R20)
R20_W2 "6.8k" MY_0402 1164.53,2939.67 r90 top value=1K (schematic designator R20)
R20_W3 "6.8k" MY_0402 1164.53,4612.9 r90 top value=1K (schematic designator R20)
R20_W4 "6.8k" MY_0402 1164.53,6187.7 r90 top value=1K (schematic designator R20)
RX_C1 "RX" solder_pin_small#4 -625.98,-94.49 r0 top (schematic designator RX)
RX_C2 "RX" solder_pin_small#2 2833.49,1968.15 r90 top (schematic designator RX)
RX_C3 "RX" solder_pin_small#2 2833.49,3542.95 r90 top (schematic designator RX)
RX_C4 "RX" solder_pin_small#2 2763.89,5195.55 r90 top (schematic designator RX)
U_C1 "U" solder_pin_small#5 342.52,-19.68 r180 bottom (schematic designator U)
U_C2 "U" solder_pin_small#2 2557.27,1968.15 r90 top (schematic designator U)
U_C3 "U" solder_pin_small#2 2557.27,3542.95 r90 top (schematic designator U)
U_C4 "U" solder_pin_small#2 2487.67,5195.55 r90 top (schematic designator U)
V_C1 "V" solder_pin_small#6 -919.69,-196.85 r180 bottom (schematic designator V)
V_C2 "V" solder_pin_small#2 2695.38,1968.15 r90 top (schematic designator V)
V_C3 "V" solder_pin_small#2 2695.38,3542.95 r90 top (schematic designator V)
V_C4 "V" solder_pin_small#2 2625.78,5195.55 r90 top (schematic designator V)
W_C1 "W" solder_pin_small#5 562.99,-535.43 r180 bottom (schematic designator W)
W_C2 "W" solder_pin_small#2 2419.16,1968.15 r90 top (schematic designator W)
W_C3 "W" solder_pin_small#2 2419.16,3542.95 r90 top (schematic designator W)
W_C4 "W" solder_pin_small#2 2349.56,5195.55 r90 top (schematic designator W)

## Footprints (in the part's own frame and the unit in brackets; to place one, negate y for a bottom-side part, rotate by r counter-clockwise, add the part's x,y. Pads: shape width x height; smd on the part's side, far side on the other; paste and mask are expansions set on the pad)
fake_net [mm] "fake net to short 1 and 2"
  rect 0.15x0.15 smd paste+0: 1(0,0) 2(0.25,0)
  Top Layer lines w0.254: 0,0 0.25,0
IND_3_3 [mm]
  rect 1x2.7 smd: 1(-1.2,0) 2(1.2,0)
  silkscreen extent -0.1,-1.6 0.15,1.55, body extent -2,-1.65 2,1.65, height 2.5
large_pin [mm]
  round 1.8 hole 1.1: 1(0,0)
Micro3 [mm] "SOT23, 3-Leads, Body 2.92x2.37mm, Pitch 0.95mm, IPC High Density"
  rect 0.8x0.55 smd: D(1.1,0) G(-1.1,0.95) S(-1.1,-0.95)
  silkscreen extent -0.3,-1.5 0.7,1.5, body extent -1.32,-1.52 1.32,1.52, height 1.12
MY_0402 [mm] "Chip Resistor, 2-Leads, Body 1.00x0.50mm, IPC Medium Density"
  rect 0.55x0.55 smd mask+0: 1(-0.475,0) 2(0.475,0)
  body extent -0.5,-0.25 0.5,0.25, height 0.5
my_0603 [mm] "0603 without silkscreen issues"
  rect 0.965x0.85 smd: 1(-0.825,0) 2(0.825,0)
  silkscreen extent -0.01,-0.41 0.01,0.41, body extent -0.8,-0.4 0.8,0.4, height 3
MY_0603 [mm] "0603 without silkscreen issues"
  rect 0.965x0.85 smd: 1(-0.825,0) 2(0.825,0)
  silkscreen extent -0.01,-0.41 0.01,0.41, body extent -0.8,-0.4 0.8,0.4, height 3
my_1206_pol [mm] "Molded Capacitor, 2-Leads, Body 3.20x1.65mm, IPC High Density"
  rect 1.55x1.2 smd: 1(-1.1,0) 2(1.1,0)
  silkscreen extent -2.12,-0.95 1.7,0.95, body extent -1.7,-0.9 1.7,0.9, height 1.6
my_1210_pol [mm] "Molded Capacitor, 2-Leads, Body 3.50x2.80mm, IPC High Density"
  rect 1.55x2.2 smd: 1(-1.25,0) 2(1.25,0)
  silkscreen extent -2.65,-1.5 1.9,1.8, body extent -1.85,-1.5 1.85,1.5, height 1.9
rad_2.5mm_0.7mm [mm] "alu cap 2.5mm between leeds 0.7mm lead d"
  round 1.2 hole 0.7: 1(-1.25,0) 2(1.25,0)
solder_pin_small#1 [mm] "pin for soldering"
  oval 0.7x1 smd: 1(-12.7,0)
solder_pin_small#2 [mm] "pin for soldering"
  oval 1x3 smd: 1(0,0)
solder_pin_small#3 [mm] "pin for soldering"
  oval 0.7x1 smd: 1(12.7,0)
solder_pin_small#4 [mm] "pin for soldering"
  oval 0.7x1 smd: 1(25.4,0)
solder_pin_small#5 [mm] "pin for soldering"
  oval 0.7x1 smd: 1(0,0)
solder_pin_small#6 [mm] "pin for soldering"
  oval 0.7x1 smd: 1(-35.56,0)
VFQFPN48 [mm] "QFN, 48-Leads, Body 7.00x7.00mm, Pitch 0.50mm, Thermal Pad 2.60x2.60mm, IPC Medium Density"
  oval 0.85x0.3 smd: 1(-3.475,2.75) 2(-3.475,2.25) 3(-3.475,1.75) 4(-3.475,1.25) 5(-3.475,0.75) 6(-3.475,0.25) 7(-3.475,-0.25) 8(-3.475,-0.75) 9(-3.475,-1.25) 10(-3.475,-1.75) 11(-3.475,-2.25) 12(-3.475,-2.75) 25(3.475,-2.75) 26(3.475,-2.25) 27(3.475,-1.75) 28(3.475,-1.25) 29(3.475,-0.75) 30(3.475,-0.25) 31(3.475,0.25) 32(3.475,0.75) 33(3.475,1.25) 34(3.475,1.75) 35(3.475,2.25) 36(3.475,2.75)
  oval 0.3x0.85 smd: 13(-2.75,-3.475) 14(-2.25,-3.475) 15(-1.75,-3.475) 16(-1.25,-3.475) 17(-0.75,-3.475) 18(-0.25,-3.475) 19(0.25,-3.475) 20(0.75,-3.475) 21(1.25,-3.475) 22(1.75,-3.475) 23(2.25,-3.475) 24(2.75,-3.475) 37(2.75,3.475) 38(2.25,3.475) 39(1.75,3.475) 40(1.25,3.475) 41(0.75,3.475) 42(0.25,3.475) 43(-0.25,3.475) 44(-0.75,3.475) 45(-1.25,3.475) 46(-1.75,3.475) 47(-2.25,3.475) 48(-2.75,3.475)
  rect 2.6x2.6 smd: EPAD(0,0)
  silkscreen extent -4.47,-3.7 3.7,3.7, body extent -3.55,-3.55 3.55,3.55, height 0.95